# Altium PCB Voltmeter_Before.PcbDoc
Units mil, origin at the board's own origin, x right, y up, seen from the top; angles counter-clockwise.
Board outline 4128 x 3274 mil, 2 copper layers (Top Layer, Bottom Layer); 29 components, 17 nets, 92 pads, 0 vias.
Unrouted connection lines stored in the file: 3.
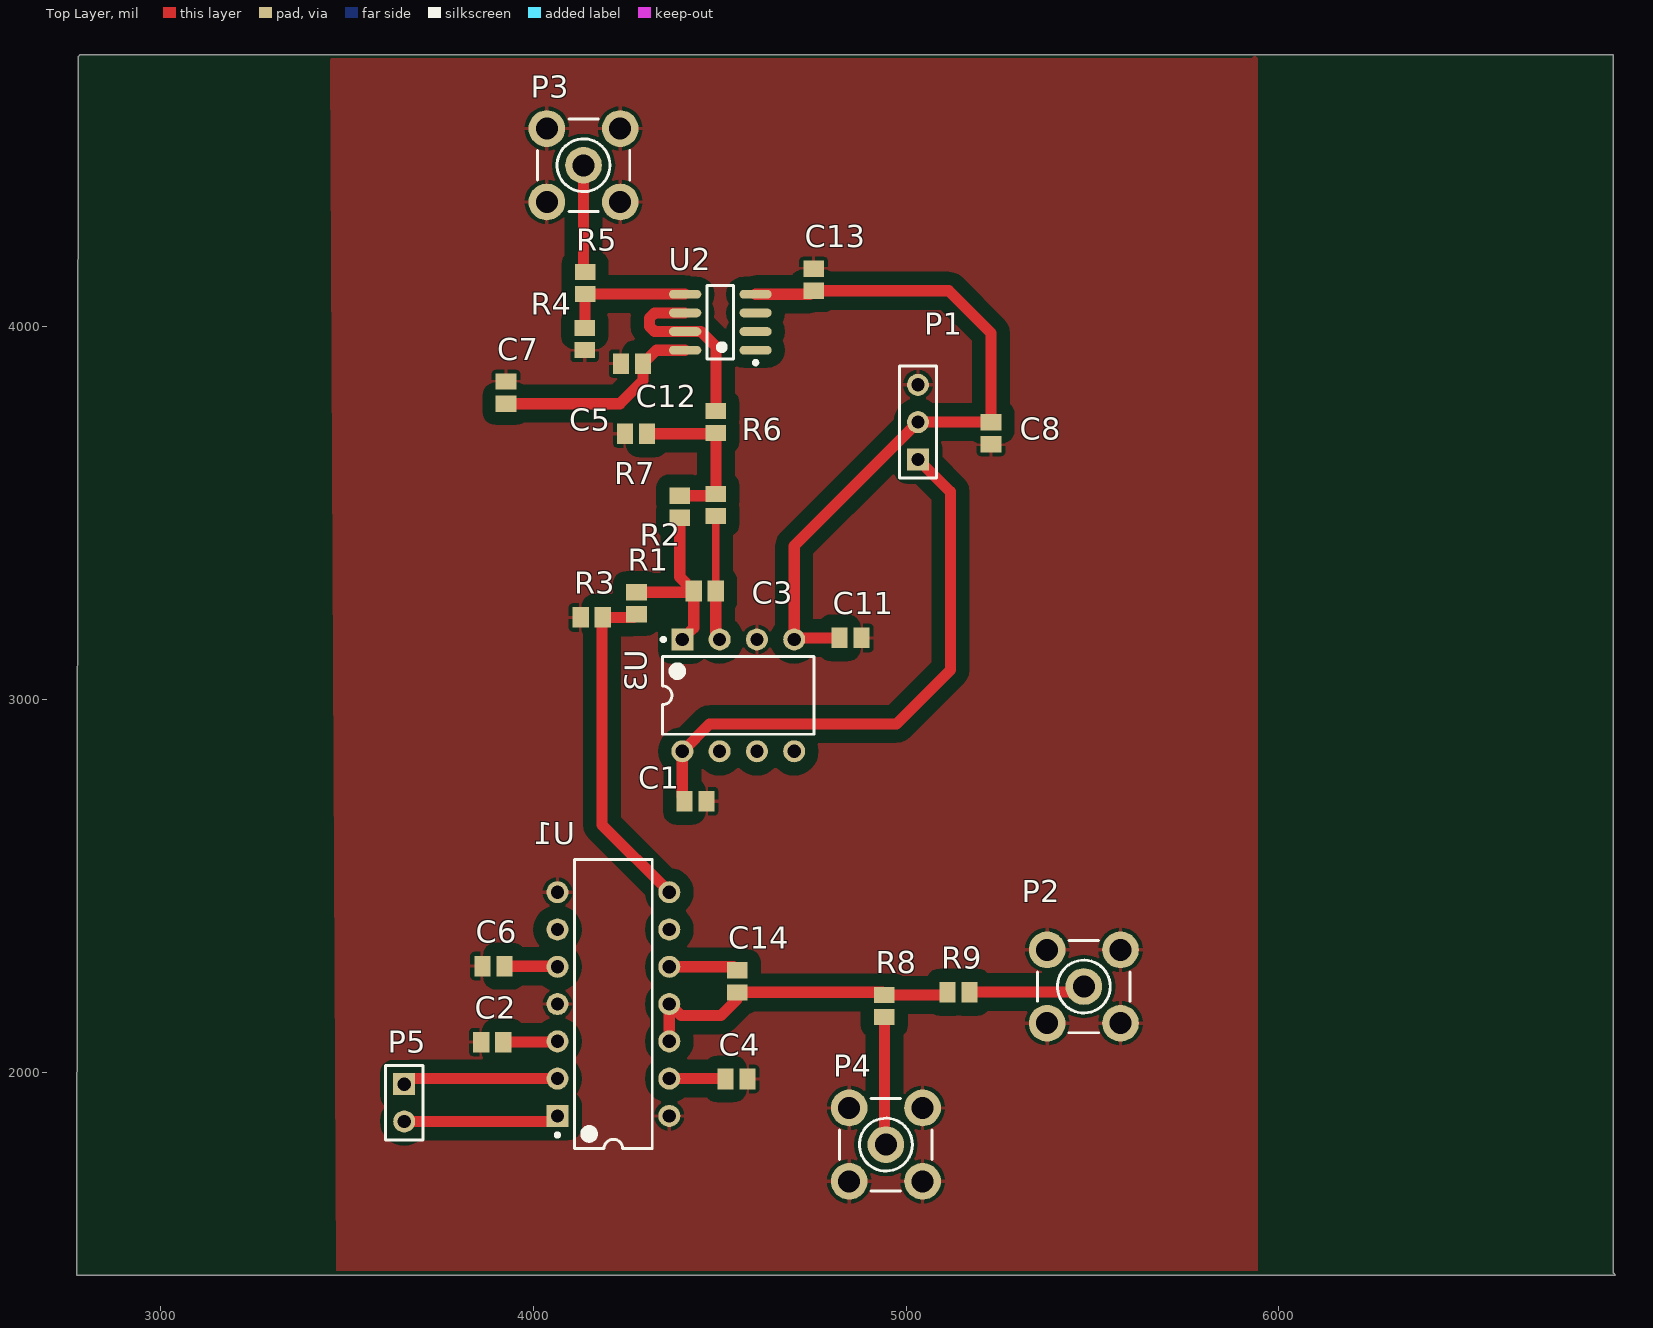
[diagram p0: Top Layer view]
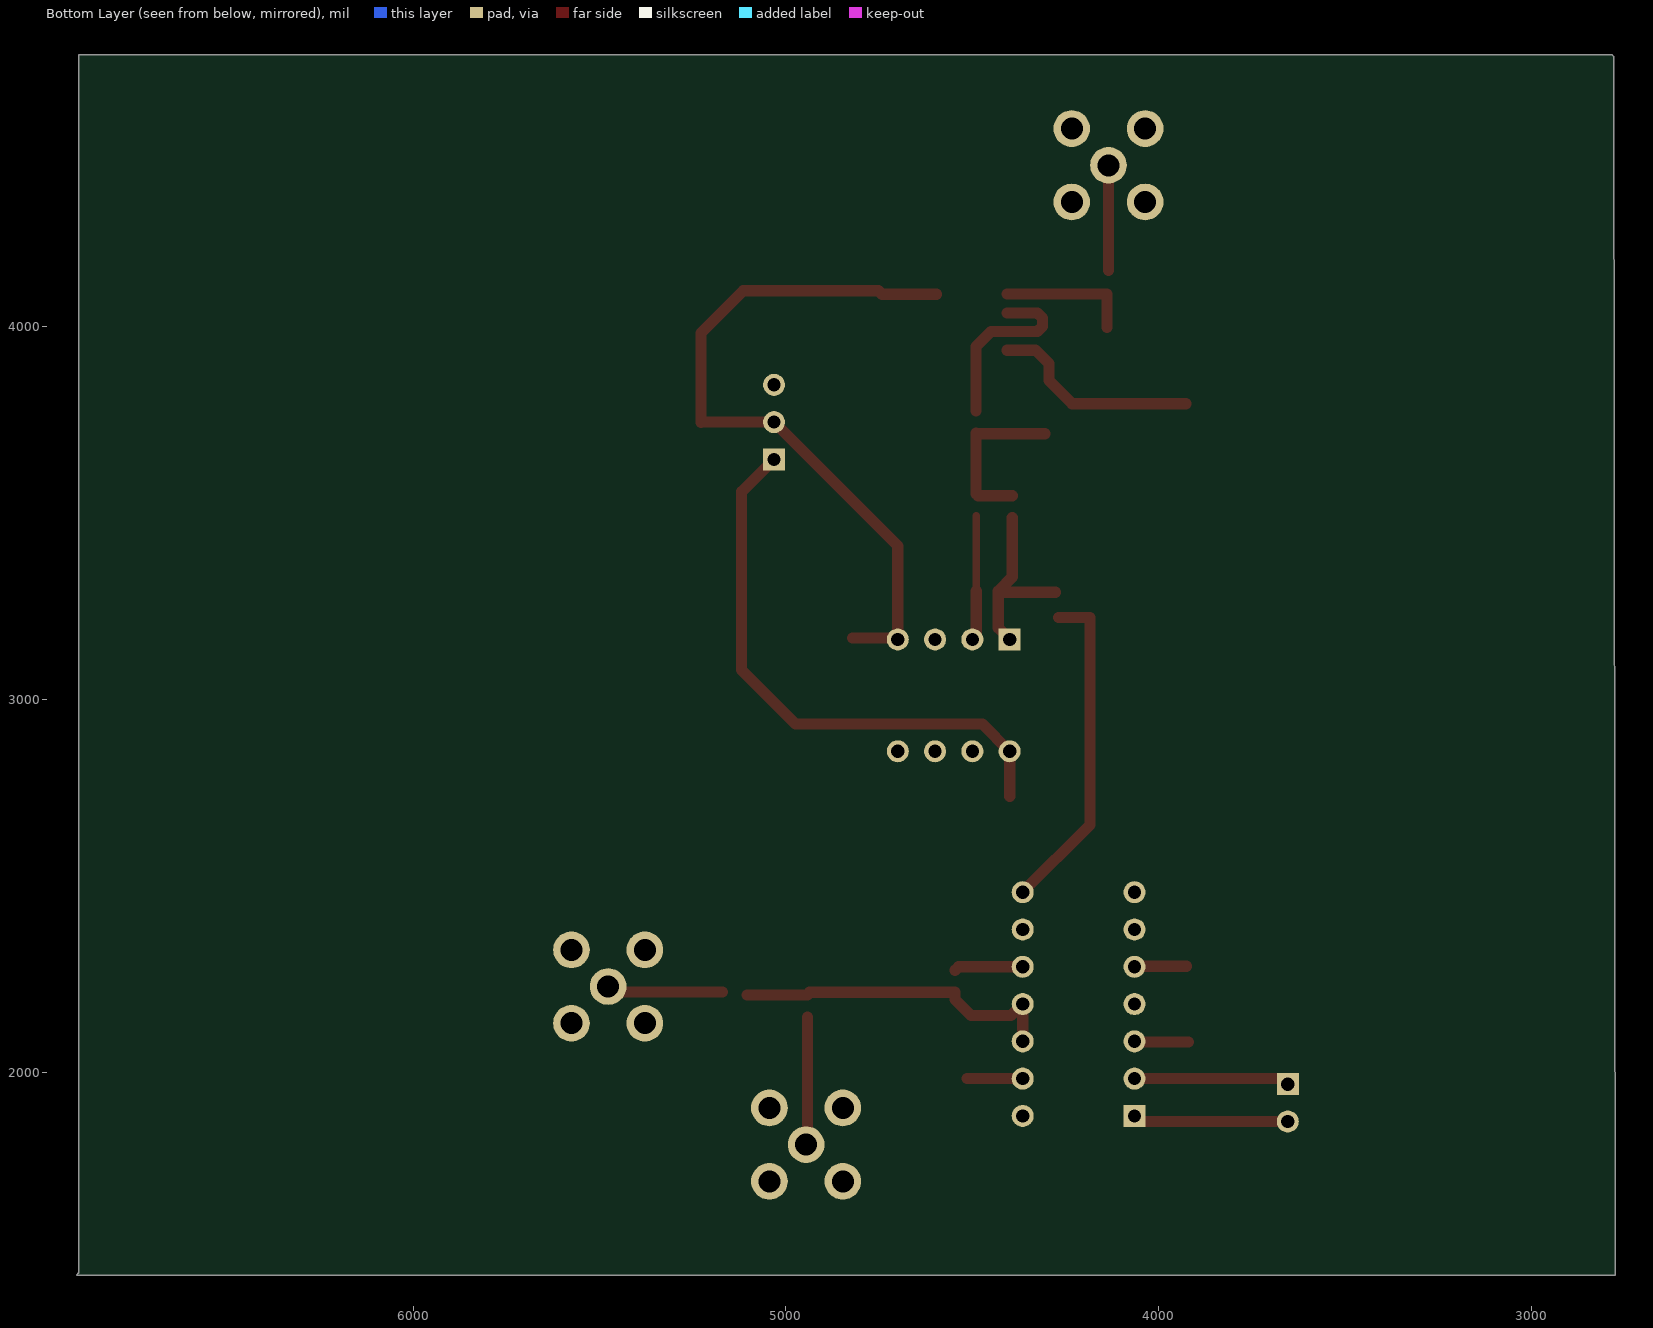
[diagram p1: Bottom Layer view, seen from below]

## Layer stack, top to bottom
Top Solder: solder mask 0.4, Solder Resist, Dk 3.5
Top Layer: signal copper 1.4
Dielectric 1: dielectric 12.6, FR-4, Dk 4.8
Bottom Layer: signal copper 1.4
Bottom Solder: solder mask 0.4, Solder Resist, Dk 3.5

## Board outline
2780,4725 2785,4730 6897,4730 6897,1462 6903,1456 2775,1456

## Design rules (kind name [scope] priority, off if disabled: settings)
Clearance Clearance_1 [InPolygon] p1: gap=35 ignorepadtopadclearanceinfootprint=FALSE
Clearance [All] p2: gap=10 ignorepadtopadclearanceinfootprint=FALSE except(0: Arc-Hole Track-Hole SMDPad-Hole THPad-Hole Via-Hole Fill-Hole Poly-Hole Region-Hole Text-Hole)
PolygonConnect [All] p1: connectstyle=Relief reliefconductorwidth=10 reliefentries=4 polygonreliefangle="90 Angle" airgapwidth=10
RoutingVias [All] p1: holewidth=28 width=50 viastyle="Through Hole" minholewidth=28 minwidth=50 maxholewidth=28 maxwidth=50
SolderMaskExpansion [All] p1: expansion=4
Width [All] p1: maxlimit=35 minlimit=20 preferedwidth=30 minimp=50.000000 maximp=50.000000 favimp=50.000000
30 further rules are at their usual default settings.

## Components (designator, comment, footprint, x,y, rotation, side; value= is the part's Value field where it differs from the comment)
C1 "Cap Semi" C0805 4435,2727 r0 top value=0.1uF
C2 "Cap Pol3" C0805 3890,2081 r180 top value=1uF
C3 "Cap Semi" C0805 4460,3291 r0 top value=1nF
C4 "Cap Pol3" C0805 4545,1982 r180 top value=1uF
C5 "Cap Semi" C0805 4276,3713 r0 top value=3.9nF
C6 "Cap Semi" C0805 3893,2285 r180 top value=47pF
C7 "Cap Pol2" C0805 3927,3823 r90 top value=10uF
C8 "Cap Pol2" C0805 5228,3714 r90 top value=10uF
C11 "Cap Semi" C0805 4851,3165 r180 top value=0.1uF
C12 "Cap Semi" C0805 4265,3901 r0 top value=0.1uF
C13 "Cap Semi" C0805 4752,4126 r90 top value=0.1uF
C14 "Cap Semi" C0805 4547,2244 r90 top value=47pF
P1 "Header 3" HDR1X3 5032,3644 r90 top
P2 "SMB" SMB_V-RJ45 5477,2230 r90 top
P3 "SMB" SMB_V-RJ45 4135,4433 r0 top
P4 "SMB" SMB_V-RJ45 4946,1806 r0 top
P5 "Header 2" HDR1X2 3654,1968 r270 top
R1 "Res2" C0805 4277,3258 r270 top value=1K
R2 "Res2" C0805 4490,3522 r270 top value=3.3K
R3 "Res2" C0805 4157,3220 r0 top value=100K
R4 "Res2" C0805 4138,3967 r90 top value=100K
R5 "Res2" C0805 4139,4117 r270 top value=1K
R6 "Res2" C0805 4490,3744 r270 top value=6.2K
R7 "Res2" C0805 4393,3517 r90 top value=7.5K
R8 "Res2" C0805 4942,2178 r270 top value=1K
R9 "Res2" C0805 5141,2215 r180 top value=1K
U1 "PGA202KP" TI-N14 4215,2183 r0 top
U2 "TL062ACD" TI-D8_N 4502,4012 r180 top
U3 "NE5532PSRG4" DIP-8 4550,3011 r270 top

## Footprints (in the part's own frame and the unit in brackets; to place one, negate y for a bottom-side part, rotate by r counter-clockwise, add the part's x,y. Pads: shape width x height; smd on the part's side, far side on the other; paste and mask are expansions set on the pad)
C0805 [mm] "Chip Capacitor, Body 2.0x1.3mm, IPC High Density"
  rect 1.1x1.4 smd: 1(-0.75,0) 2(0.75,0)
  body extent -1.1,-0.72 1.1,0.72, height 1.4
DIP-8 [mm] "DIP; 8 Leads; Row Spacing 7.62 mm; Pitch 2.54 mm"
  rect 1.5x1.5 hole 0.9: 1(-3.81,-3.81)
  round 1.5 hole 0.9: 2(-3.81,-1.27) 3(-3.81,1.27) 4(-3.81,3.81) 5(3.81,3.81) 6(3.81,1.27) 7(3.81,-1.27) 8(3.81,-3.81)
  silkscreen extent -3.93,-5.23 2.65,5.15, body extent -3.6,-5.15 3.6,5.15, height 5.08
HDR1X2 [mm] "Connector; Header; 2 Position"
  rect 1.5x1.5 hole 0.9: 1(0,0)
  round 1.5 hole 0.9: 2(2.54,0)
  silkscreen extent -1.27,-1.27 3.81,1.27
HDR1X3 [mm] "Connector; Header; 3 Position"
  rect 1.5x1.5 hole 0.9: 1(0,0)
  round 1.5 hole 0.9: 2(2.54,0) 3(5.08,0)
  silkscreen extent -1.27,-1.27 6.35,1.27
SMB_V-RJ45 [mm] "Connector; SMB Straight"
  round 2.5 hole 1.5: 1(0,0) 2(-2.5,-2.5) 2(-2.5,2.5) 2(2.5,-2.5) 2(2.5,2.5)
  silkscreen extent -3.15,-3.15 3.15,3.15
TI-D8_N [mm] "SOIC, 8-Leads, Body 4.9x3.9mm, Pitch 1.27mm, IPC Medium Density"
  oval 2.2x0.6 smd: 1(-2.4,1.905) 2(-2.4,0.635) 3(-2.4,-0.635) 4(-2.4,-1.905) 5(2.4,-1.905) 6(2.4,-0.635) 7(2.4,0.635) 8(2.4,1.905)
  silkscreen extent -2.53,-2.5 0.9,2.88, body extent -2,-2.5 2,2.5, height 1.75
TI-N14 [mm] "DIP, 14-Leads, Body 19.7x6.6mm, Pitch 2.54mm"
  rect 1.5x1.5 hole 0.9: 1(-3.81,-7.62)
  round 1.5 hole 0.9: 2(-3.81,-5.08) 3(-3.81,-2.54) 4(-3.81,0) 5(-3.81,2.54) 6(-3.81,5.08) 7(-3.81,7.62) 8(3.81,7.62) 9(3.81,5.08) 10(3.81,2.54) 11(3.81,0) 12(3.81,-2.54) 13(3.81,-5.08) 14(3.81,-7.62)
  silkscreen extent -3.93,-9.85 2.65,9.85, body extent -3.3,-9.85 3.3,9.85, height 5.08

## Part data
C1 C3 C5 C6 C11 C12 C13 C14: "Capacitor (Semiconductor SIM Model)", LatestRevisionDate=29-May-2009, LatestRevisionNote="IPC-7351 Footprint Added.", PackageDescription="Chip Capacitor", PackageReference=C1206, Published=8-Jun-2000, Publisher="Altium Limited"
C2 C4: "Polarized Capacitor (Surface Mount)", LatestRevisionDate=29-May-2009, LatestRevisionNote="IPC-7351 Footprint Added.", PackageDescription="Chip Capacitor", PackageReference=C0805, Published=8-Jun-2000, Publisher="Altium Limited"
C7 C8: "Polarized Capacitor (Axial)", LatestRevisionDate=17-Jul-2002, LatestRevisionNote="Re-released for DXP Platform.", PackageDescription="Polarized Capacitor; 2 Leads", PackageReference=POLAR0.8, Published=8-Jun-2000, Publisher="Altium Limited"
P1: "Header, 3-Pin", LatestRevisionDate=17-Jul-2002, LatestRevisionNote="Re-released for DXP Platform.", Publisher="Altium Limited"
P2 P3 P4: "SMB Straight Connector", LatestRevisionDate=17-Jul-2002, LatestRevisionNote="Re-released for DXP Platform.", Publisher="Altium Limited"
P5: "Header, 2-Pin", LatestRevisionDate=17-Jul-2002, LatestRevisionNote="Re-released for DXP Platform.", Publisher="Altium Limited"
R1 R2 R3 R4 R5 R6 R7 R8 R9: "Resistor", LatestRevisionDate=17-Jul-2002, LatestRevisionNote="Re-released for DXP Platform.", PackageDescription="Axial Device, Thru-Hole; 2 Leads; 0.4 in Pin Spacing", PackageReference=AXIAL-0.4, Published=8-Jun-2000, Publisher="Altium Limited"
U1: "Digitally Controlled Programmable-Gain Instrumentation Amplifier, -25 to 85 degC, 14-pin DIP (N14), Green (RoHS & no Sb/Br)", Input Bias Current (+/-)(Max)(nA)=0.05, Manufacturer="Texas Instruments", Quiescent Current (+/-)(Typ)(mA)=6.5, Supplier Part Number 1=PGA202KP-ND, Code_JEDEC=MS-001, Common Mode Input High(Min)(V)=10, Common Mode Input Low(Min)(V)=-10, ComponentLink1Description="Manufacturer URL", ComponentLink1URL=http://www.ti.com/, ComponentLink2Description=Datasheet, ComponentLink2URL=http://www.ti.com/general/docs/lit/getliterature.tsp?genericPartNumber=PGA202&fileType=pdf, ComponentLink3Description="Package Specification", ComponentLink3URL=http://www.ti.com/lit/ml/mpdi002c/mpdi002c.pdf, DatasheetVersion=SBOS002, Eco-Plan="Green (RoHS & no Sb/Br)", Gain(V/V)="1, 10, 100, 1000", Gain Error (+/-)(Max)(%)=0.25, Mounting Technology="Through Hole", Non-Linearity (+/-)(Max)(%)=0.015, Number of Channels=1, PackageDescription="14-Pin Plastic In-Line, Body 19.305 x 6.35 mm, Pitch 2.54 mm", PackageReference=N14, PackageVersion="4040049/E, 12/2002", PartNumber=PGA202KP, Settling Time to 0.01%(Typ)(us)=2, Slew Rate(Typ)(V/us)=20, SubFamily="Programmable Gain Amplifier", Supplier 1=Digi-Key, Supplier 2=Farnell, Supplier 3=Newark, Supplier 4=Mouser, Supplier Part Number 2=1648647, Supplier Part Number 3=80K6038, Supplier Part Number 4=595-PGA202KP, Vs(Max)(V)=36, Vs(Min)(V)=12
U2: "Low-Power JFET-Input Operational Amplifier, 7 to 36 V, 0 to 70 degC, 8-pin SOIC (D8), Green (RoHS & no Sb/Br)", Manufacturer="Texas Instruments", Rating=Catalog, Supplier Part Number 1=296-7175-5-ND, Total Supply Voltage(Max)(+5V is 5, +/-5V is 10)=36, Total Supply Voltage(Min)(+5V is 5, +/-5V is 10)=7, CMRR(Min)(dB)=80, Code_JEDEC=MS-012, ComponentLink1Description="Manufacturer URL", ComponentLink1URL=http://www.ti.com/, ComponentLink2Description=Datasheet, ComponentLink2URL=http://www.ti.com/lit/ds/symlink/tl062a.pdf, ComponentLink3Description="Package Specification", ComponentLink3URL=http://www.ti.com/litv/pdf/msoi002j, DatasheetVersion=SLOS078J, Eco-Plan="Green (RoHS & no Sb/Br)", GBW(Typ)(MHz)=1, IIB(Max)(pA)=200, Iq per channel(Max)(mA)=0.25, Mounting Technology="Surface Mount", Number of Channels=2, Offset Drift(Typ)(uV/C)=10, PackageDescription="8-Pin Plastic Small Outline, Body 4.9 x 3.9 mm, Pitch 1.27 mm", PackageReference=D8, PackageVersion="4040047-3/M, 06/2011", PartNumber=TL062ACD, Slew Rate(Typ)(V/us)=3.5, Sub Family="General Purpose Amplifier, High Supply Voltage Amplifier (>=30V), Low Power Amp (<=500uA)", Supplier 1=Digi-Key, Supplier 2=Farnell, Supplier 3=Newark, Supplier 4=Mouser, Supplier Part Number 2=9593241, Supplier Part Number 3=08F9224, Supplier Part Number 4=595-TL062ACD, Vio (25C)(Max)(mV)=6, Vn at 1kHz(Typ)(nV/rtHz)=42
U3: "Dual Low-Noise High-Speed Audio Operational Amplifier, 10 to 30 V, 0 to 70 degC, 8-pin SOP (PS8), Green (RoHS & no Sb/Br)", Manufacturer="Texas Instruments", Supplier Part Number 1=NE5532PSRG4-ND, Total Supply Voltage(Max)(+5V is 5, +/-5V is 10)=30, Total Supply Voltage(Min)(+5V is 5, +/-5V is 10)=10, CMRR(Min)(dB)=70, ComponentLink1Description="Manufacturer URL", ComponentLink1URL=http://www.ti.com/, ComponentLink2Description=Datasheet, ComponentLink2URL=http://www.ti.com/lit/ds/symlink/ne5532.pdf, ComponentLink3Description="Package Specification", ComponentLink3URL=http://www.ti.com/litv/pdf/msop001a, DatasheetVersion=SLOS075I, Eco-Plan="Green (RoHS & no Sb/Br)", GBW(Typ)(MHz)=10, IIB(Max)(pA)=800000, Iq per channel(Max)(mA)=4, Mounting Technology="Surface Mount", Number of Channels=2, PackageDescription="8-Pin Plastic Small Outline, Body 5.3 x 6.2 mm, Pitch 1.27 mm", PackageReference=PS8, PackageVersion="4040063/C, 03/2003", PartNumber=NE5532PSRG4, Slew Rate(Typ)(V/us)=9, Sub Family="General Purpose Amplifier, High Supply Voltage Amplifier (>=30V), Low Noise Amp (<=10nV/rtHz)", Supplier 1=Digi-Key, Supplier 2=Newark, Supplier 3=Mouser, Supplier Part Number 2=46M6753, Supplier Part Number 3=595-NE5532PSRG4, Vio (25C)(Max)(mV)=4, Vn at 1kHz(Typ)(nV/rtHz)=5

## Nets (pads, with @x,y where several pads share a name; then routed paths per layer and width w, separated by ;. In a path a pad name is that pad's centre, name@x,y a point inside that pad or via, vN(x,y) a via of type N, cw(c..) or ccw(c..) an arc to the next point about the centre after c; other vN are vias at no path point)
+5: C1.1 C2.1 C7.1 C12.2 P1.1 U1.3 U2.8 U3.8 | length 2240.9
  Top Layer w30: C2.1@3920,2081.53 U1.3@4063.53,2081.53 ; C7.1 4232.47,3793.47 4294.53,3855.53 C12.2 4330.53,3937 U2.8 ; C1.1@4400,2740.53 U3.8 4473,2934 4974,2934 5119,3079 5119,3557 P1.1
-5: C4.2 C8.2 C11.2 C13.1 P1.2 U1.13 U2.4 U3.4 | length 2104.9
  Top Layer w30: U1.13 C4.2@4514.47,1983 ; U2.4 4742.53,4087 C13.1 5114.53,4096.47 5228,3983 C8.2 ; U3.4 4700,3412 P1.2 C8.2@5227.53,3744 ; U3.4@4704,3165 C11.2
GND: C1.2 C2.2 C4.1 C5.1 C6.2 C7.2 C8.1 C11.1 C12.1 C13.2 P1.3 P2.2 P3.2 P4.2 R3.1 R4.1 U1.4 U1.7 U1.14 U3.3
NetC3_1: C3.1 R1.1 R7.1 U3.1 | length 504.6
  Top Layer w30: R1.1 C3.1@4427,3287.53 ; R7.1 4393,3328.47 C3.1 4430.47,3191.47 U3.1
NetC3_2: C3.2 R2.2 U3.2 | length 335.3
  Top Layer w20: C3.2@4490,3291.47 R2.2
  Top Layer w30: C3.2 4489.53,3171.47 U3.2
NetC5_2: C5.2 R2.1 R6.2 R7.2 | length 437.9
  Top Layer w30: C5.2 R6.2@4488.53,3713 ; R7.2 R2.1@4485,3546.53 ; R2.1 R6.2
NetC6_1: C6.1 U1.5 | length 137.5
  Top Layer w30: C6.1@3926,2284.47 U1.5@4063.53,2284.47
NetC14_1: C14.1 R8.1 R9.2 U1.11 U1.12 | length 883.9
  Top Layer w30: U1.12 U1.11 4396,2152 4503.53,2152 4547,2195.47 C14.1 R8.1@4937.06,2214.47 ; R8.1 R9.2@5104,2207.53
NetC14_2: C14.2 U1.10 | length 185.9
  Top Layer w30: U1.10 4537.53,2283 C14.2
NetP2_1: P2.1 R9.1 | length 291.5
  Top Layer w30: R9.1 P2.1@5462,2215
NetP3_1: P3.1 R5.1 | length 282.5
  Top Layer w30: R5.1@4135,4150.53 P3.1
NetP4_1: P4.1 R8.2 | length 338.5
  Top Layer w30: P4.1@4942,1810 R8.2
NetP5_1: P5.1 U1.2 | length 417.2
  Top Layer w30: P5.1 3669,1983 U1.2
NetP5_2: P5.2 U1.1 | length 417.2
  Top Layer w30: P5.2 4050,1868 U1.1
NetR1_2: R1.2 R3.2 U1.8 | length 893.8
  Top Layer w30: R3.2@4184.53,3220 4184.53,2663.47 U1.8 ; R3.2 R1.2@4268.53,3220
NetR4_2: R4.2 R5.2 U2.5 | length 358
  Top Layer w30: R4.2@4139,3997.53 R5.2 U2.5@4407.04,4087.47
NetR6_1: R6.1 U2.6 U2.7 | length 497.2
  Top Layer w30: U2.6 4326,4037 4312,4023 4312,4001 4326,3987 U2.7 4450,3987 4490,3947 R6.1
pads on no net: U1.6 U1.9 U2.1 U2.2 U2.3 U3.5 U3.6 U3.7

## Polygon pours and split planes (outlines as drawn)
GND on Top Layer "Top Layer-No Net" (solid, remove dead copper, pour order 22): 3455,4720 5928,4720 5936,4728 5944,4720 5944,1468 3471,1468